# Altium PCB LQFP (32-100 PIN).PcbDoc
Units mm, origin at the board's own origin, x right, y up, seen from the top; angles counter-clockwise.
Board outline 41.4 x 38.6 mm, 2 copper layers (Top Layer, Bottom Layer), stack 1.569 mm thick; 6 components, 100 nets, 264 pads, 0 vias.
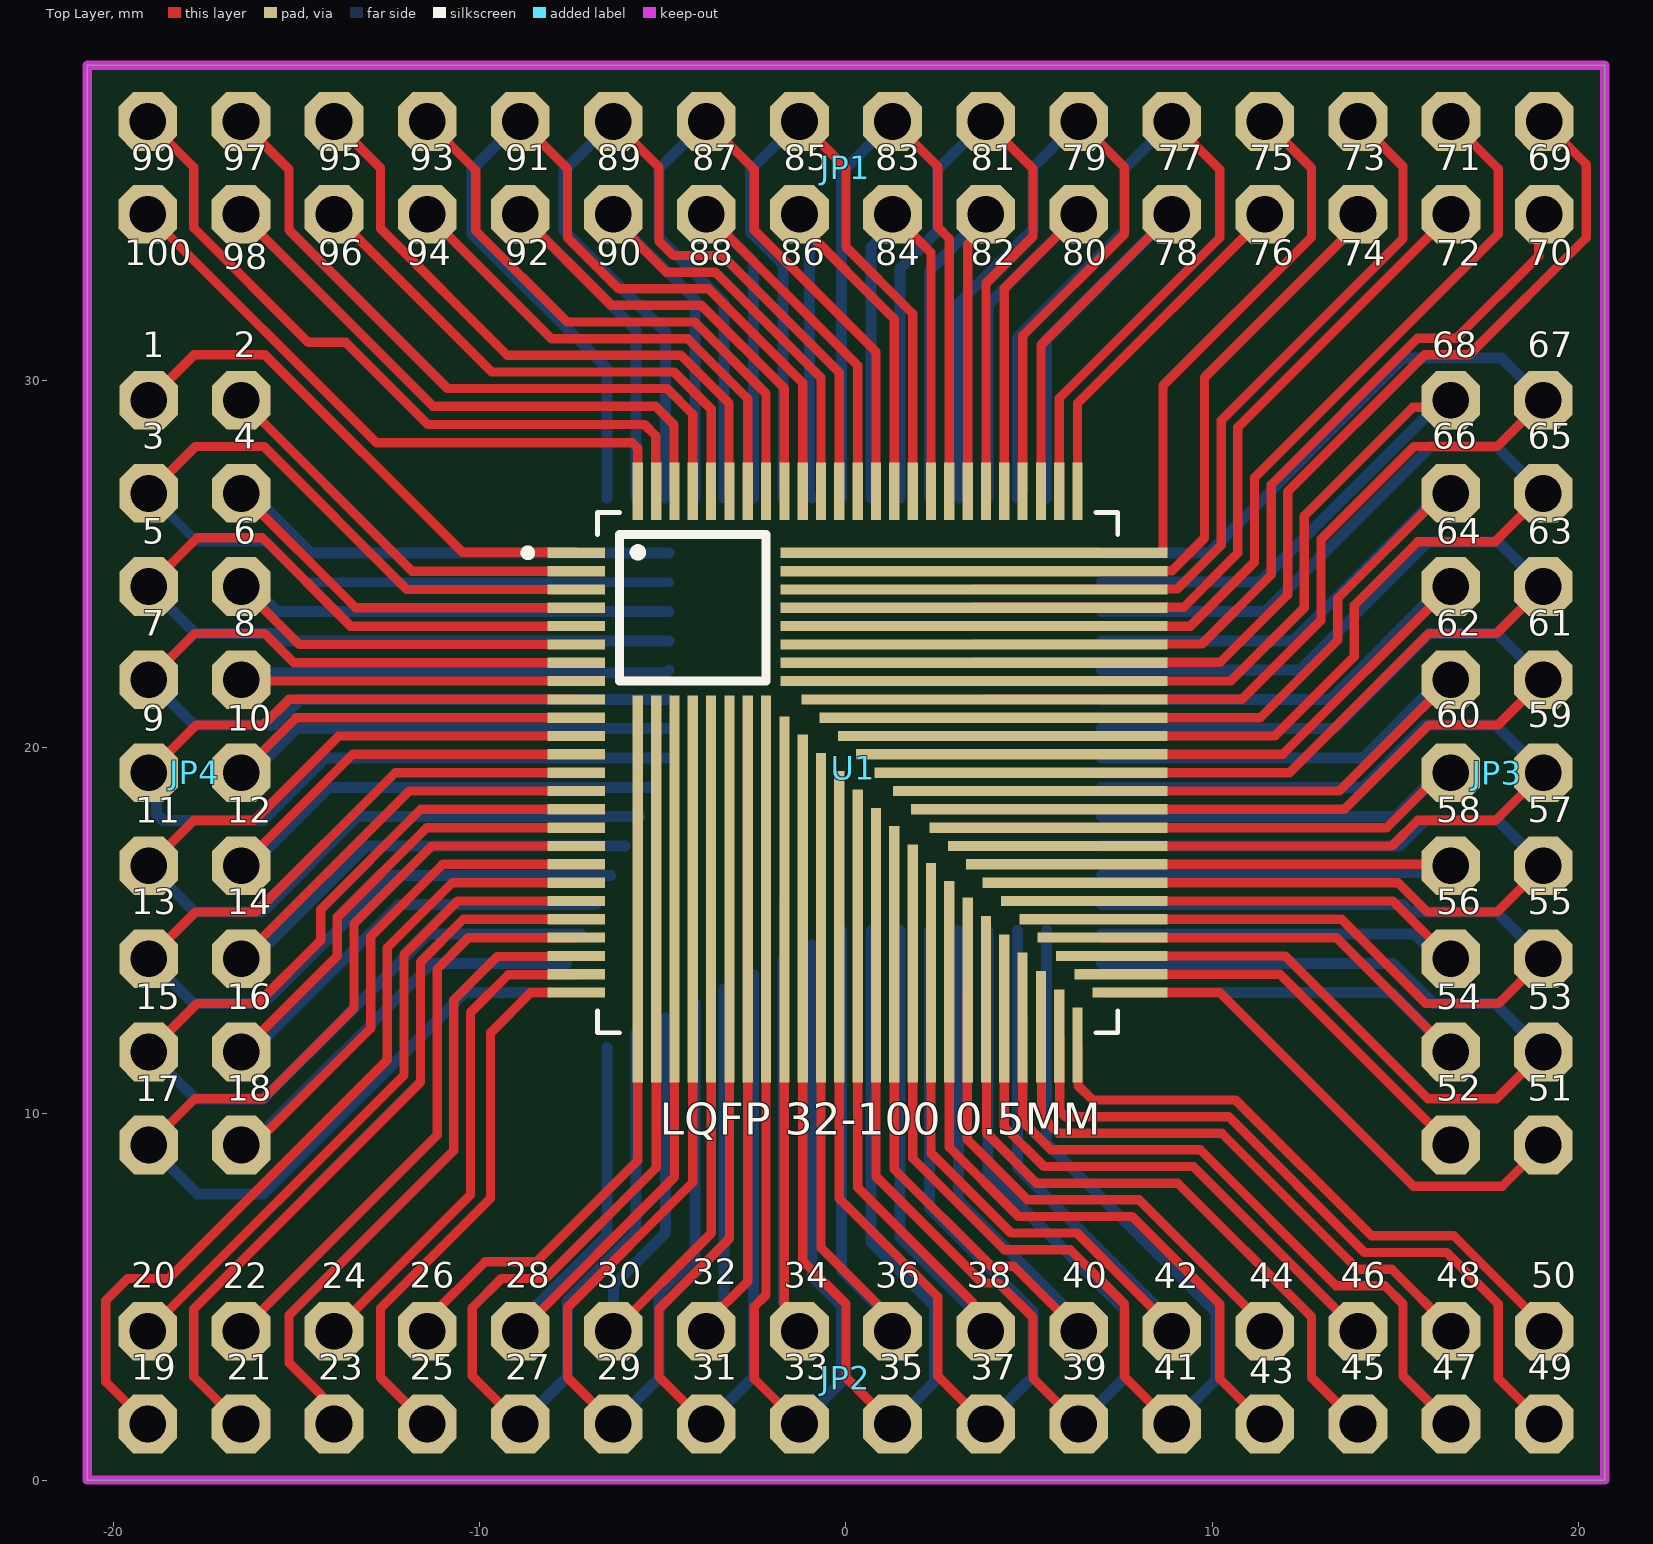
[diagram p0: Top Layer view]
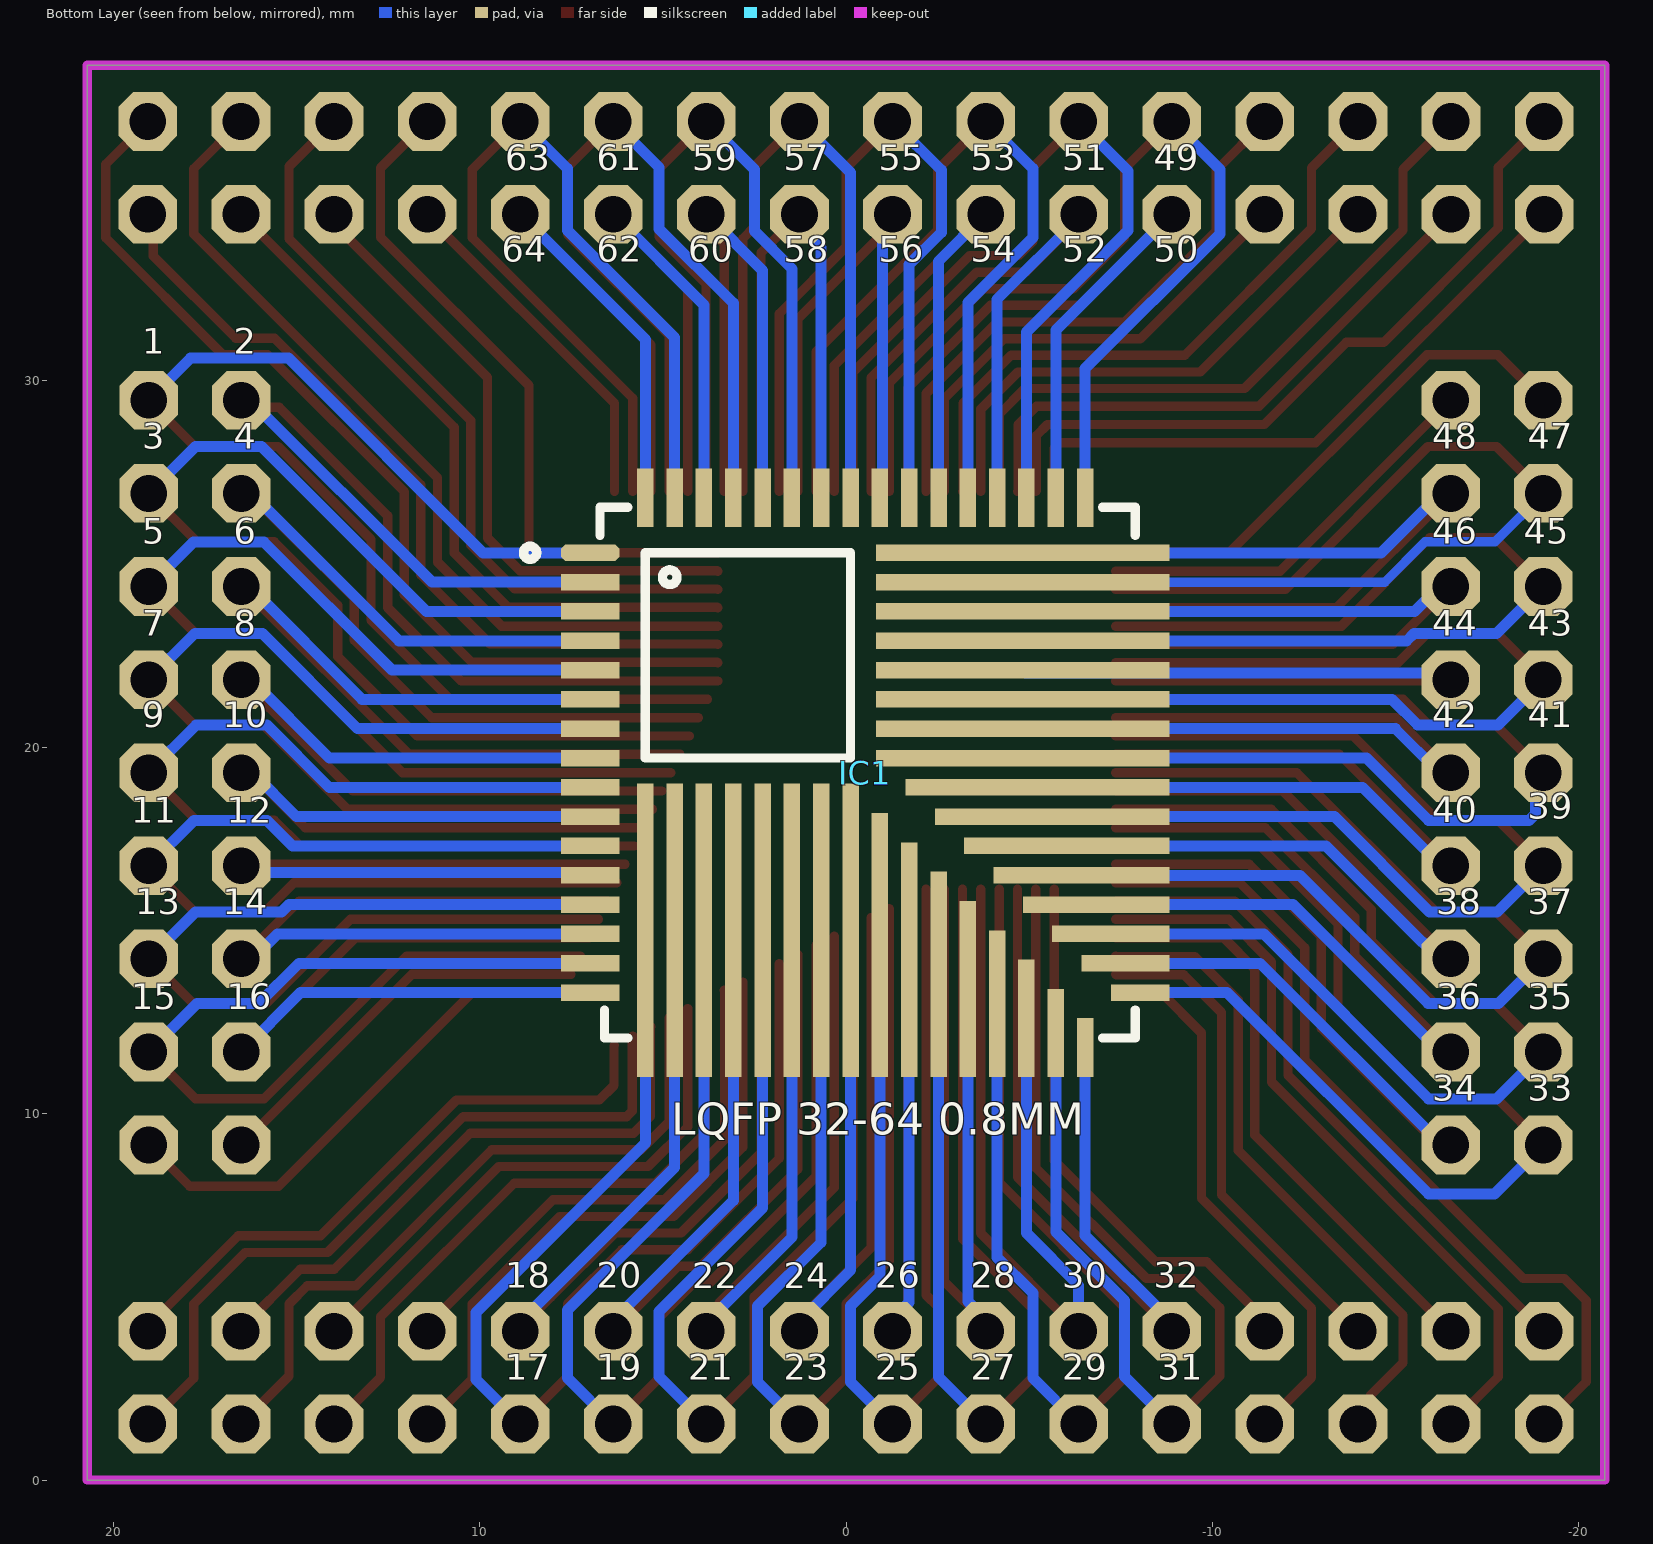
[diagram p1: Bottom Layer view, seen from below]
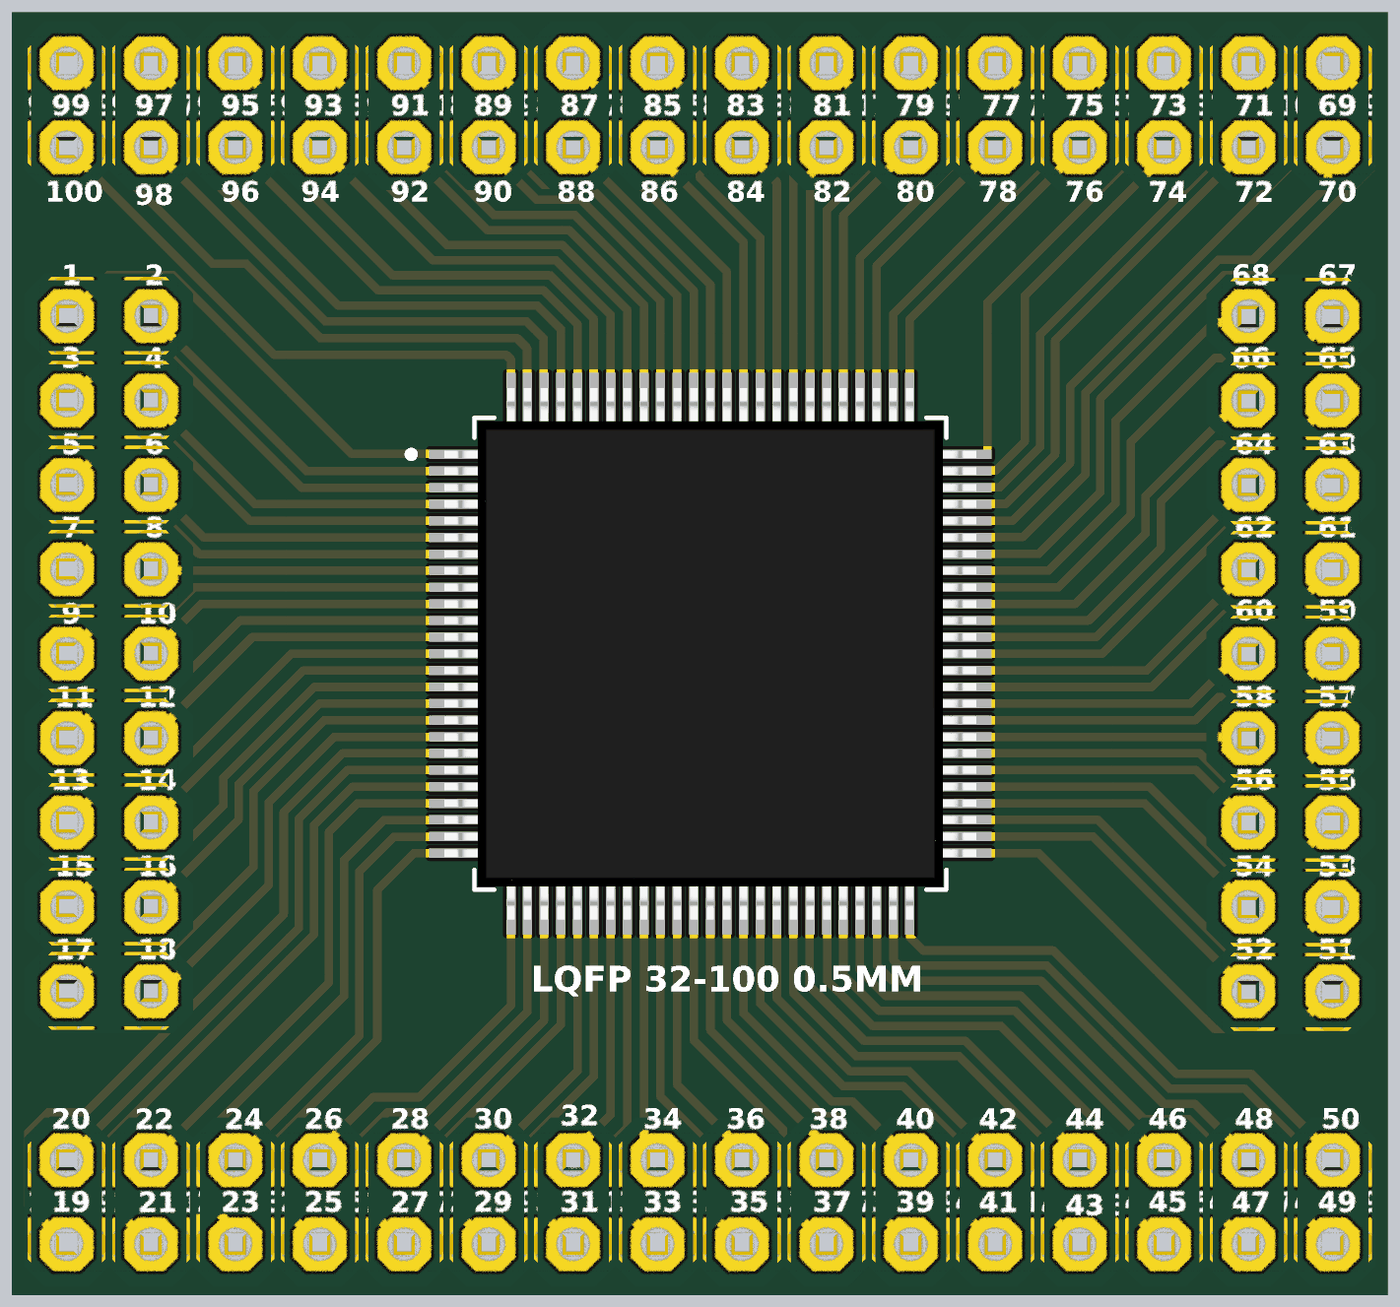
[diagram p2: 3D render of the assembled board from above, using the file's embedded part models]

## Layer stack, top to bottom
Top Solder: solder mask 0.0102, Solder Resist, Dk 3.5
Top Layer: signal copper 0.035
Dielectric 1: core 1.4986, Core-043, Dk 4.3
Bottom Layer: signal copper 0.035
Bottom Solder: solder mask 0.0102, Solder Resist, Dk 3.5

## Board outline
-20.7,0 -20.7,38.6 20.7,38.6 20.7,0

## Design rules (kind name [scope] priority, off if disabled: settings)
Clearance [All] p1: gap=0.254 ignorepadtopadclearanceinfootprint=FALSE except(0: Arc-Hole Track-Hole SMDPad-Hole THPad-Hole Via-Hole Fill-Hole Poly-Hole Region-Hole Text-Hole; 0.1: Arc-Text Track-Text SMDPad-Text THPad-Text Via-Text Fill-Text Poly-Text Region-Text Text-Text; 0.2: Arc-Arc Arc-Track Arc-SMDPad Arc-THPad Arc-Via Track-Track Track-SMDPad Track-THPad Track-Via SMDPad-SMDPad SMDPad-THPad SMDPad-Via THPad-THPad THPad-Via Via-Via)
PlaneClearance [All] p1 off: clearance=0.508
PlaneConnect [All] p1 off: planeconnectstyle=Relief reliefexpansion=0.508 reliefentries=4 reliefconductorwidth=0.254 reliefairgap=0.254
PolygonConnect [All] p1 off: connectstyle=Relief reliefconductorwidth=0.254 reliefentries=4 polygonreliefangle="90 Angle" airgapwidth=0.254
RoomDefinition "LQFP (32-100 PIN) 0.5mm" [InComponentClass('LQFP (32-100 PIN) 0.5mm')] p1: confinementstyle=ConfineIn formatcopy=TRUE lockcomponents=TRUE outline -22.2,-1.694 21.8,-1.694 21.8,39.5 -22.2,39.5
RoutingVias [All] p1: holewidth=0.711 width=1.27 viastyle="Through Hole" minholewidth=0.711 minwidth=1.27 maxholewidth=0.711 maxwidth=1.27
SolderMaskExpansion [All] p1: expansion=0.102 istentingtop=FALSE
Width [All] p1: maxlimit=0.4 minlimit=0.2 preferedwidth=0.254
28 further rules are at their usual default settings.

## Components (designator, comment, footprint, x,y, rotation, side; value= is the part's Value field where it differs from the comment)
IC1 "ATMEGA128 SMD" "TQFP 32-64 0.8MM" -0.525,19.3 r180 bottom
JP1 "HEADER 16X2" "Double Row 32P 2.54mm" 0,37.07 r180 top
JP2 "HEADER 16X2" "Double Row 32P 2.54mm" 0,1.53 r0 top
JP3 "HEADER 9X2" "Double Row 18P 2.54mm" 19.05,19.29 r90 top
JP4 "HEADER 9X2" "Double Row 18P 2.54mm" -19.05,19.31 r270 top
U1 "STM32F407VGT6" "LQFP (32-100 PIN) 0.5mm" 0.319,19.3 r0 top

## Footprints (in the part's own frame and the unit in brackets; to place one, negate y for a bottom-side part, rotate by r counter-clockwise, add the part's x,y. Pads: shape width x height; smd on the part's side, far side on the other; paste and mask are expansions set on the pad)
"Double Row 18P 2.54mm" [mm]
  oct 1.6x1.6 hole 1: 1(-10.15,0.02) 2(-10.15,2.55) 3(-7.61,0.02) 4(-7.61,2.55) 5(-5.07,0.02) 6(-5.07,2.55) 7(-2.53,0.02) 8(-2.53,2.55) 9(0.01,0.02) 10(0.01,2.55) 11(2.55,0.02) 12(2.55,2.55) 13(5.09,0.02) 14(5.09,2.55) 15(7.63,0.02) 16(7.63,2.55) 17(10.17,0.02) 18(10.17,2.55)
  body extent -11.44,-1.27 11.42,3.81, height 8.62
"Double Row 32P 2.54mm" [mm]
  oct 1.6x1.6 hole 1: 1(-19.05,0) 2(-19.05,2.53) 3(-16.51,0) 4(-16.51,2.53) 5(-13.97,0) 6(-13.97,2.53) 7(-11.43,0) 8(-11.43,2.53) 9(-8.89,0) 10(-8.89,2.53) 11(-6.35,0) 12(-6.35,2.53) 13(-3.81,0) 14(-3.81,2.53) 15(-1.27,0) 16(-1.27,2.53) 17(1.27,0) 18(1.27,2.53) 19(3.81,0) 20(3.81,2.53) 21(6.35,0) 22(6.35,2.53) 23(8.89,0) 24(8.89,2.53) 25(11.43,0) 26(11.43,2.53) 27(13.97,0) 28(13.97,2.53) 29(16.51,0) 30(16.51,2.53) 31(19.05,0) 32(19.05,2.53)
  body extent -20.32,-1.27 20.32,3.81, height 8.62
"LQFP (32-100 PIN) 0.5mm" [mm]
  rect 1.56x0.28 smd: 1(-7.68,6) 2(-7.68,5.5) 3(-7.68,5) 4(-7.68,4.5) 5(-7.68,4) 6(-7.68,3.5) 7(-7.68,3) 8(-7.68,2.5) 9(-7.68,2) 10(-7.68,1.5) 11(-7.68,1) 12(-7.68,0.5) 13(-7.68,0) 14(-7.68,-0.5) 15(-7.68,-1) 16(-7.68,-1.5) 17(-7.68,-2) 18(-7.68,-2.5) 19(-7.68,-3) 20(-7.68,-3.5) 21(-7.68,-4) 22(-7.68,-4.5) 23(-7.68,-5) 24(-7.68,-5.5) 25(-7.68,-6)
  rect 0.28x10.56 smd: 26(-6,-3.18) 27(-5.5,-3.18) 28(-5,-3.18) 29(-4.5,-3.18) 30(-4,-3.18) 31(-3.5,-3.18) 32(-3,-3.18) 33(-2.5,-3.18)
  rect 0.28x10 smd: 34(-2,-3.46)
  rect 0.28x9.5 smd: 35(-1.5,-3.71)
  rect 0.28x9 smd: 36(-1,-3.96)
  rect 0.28x8.5 smd: 37(-0.5,-4.21)
  rect 0.28x8 smd: 38(0,-4.46)
  rect 0.28x7.5 smd: 39(0.5,-4.71)
  rect 0.28x7 smd: 40(1,-4.96)
  rect 0.28x6.5 smd: 41(1.5,-5.21)
  rect 0.28x6 smd: 42(2,-5.46)
  rect 0.28x5.5 smd: 43(2.5,-5.71)
  rect 0.28x5.05 smd: 44(3,-5.935)
  rect 0.28x4.55 smd: 45(3.5,-6.185)
  rect 0.28x4.05 smd: 46(4,-6.435)
  rect 0.28x3.55 smd: 47(4.5,-6.685)
  rect 0.28x3.05 smd: 48(5,-6.935)
  rect 0.28x2.55 smd: 49(5.5,-7.185)
  rect 0.28x2.05 smd: 50(6,-7.435)
  rect 2.05x0.28 smd: 51(7.435,-6)
  rect 2.55x0.28 smd: 52(7.185,-5.5)
  rect 3.05x0.28 smd: 53(6.935,-5)
  rect 3.55x0.28 smd: 54(6.685,-4.5)
  rect 4.05x0.28 smd: 55(6.435,-4)
  rect 4.55x0.28 smd: 56(6.185,-3.5)
  rect 5.05x0.28 smd: 57(5.935,-3)
  rect 5.5x0.28 smd: 58(5.71,-2.5)
  rect 6x0.28 smd: 59(5.46,-2)
  rect 6.5x0.28 smd: 60(5.21,-1.5)
  rect 7x0.28 smd: 61(4.96,-1)
  rect 7.5x0.28 smd: 62(4.71,-0.5)
  rect 8x0.28 smd: 63(4.46,0)
  rect 8.5x0.28 smd: 64(4.21,0.5)
  rect 9x0.28 smd: 65(3.96,1)
  rect 9.5x0.28 smd: 66(3.71,1.5)
  rect 10x0.28 smd: 67(3.46,2)
  rect 10.56x0.28 smd: 68(3.18,2.5) 69(3.18,3) 70(3.18,3.5) 71(3.18,4) 72(3.18,4.5) 73(3.18,5) 74(3.18,5.5) 75(3.18,6)
  rect 0.28x1.56 smd: 76(6,7.68) 77(5.5,7.68) 78(5,7.68) 79(4.5,7.68) 80(4,7.68) 81(3.5,7.68) 82(3,7.68) 83(2.5,7.68) 84(2,7.68) 85(1.5,7.68) 86(1,7.68) 87(0.5,7.68) 88(0,7.68) 89(-0.5,7.68) 90(-1,7.68) 91(-1.5,7.68) 92(-2,7.68) 93(-2.5,7.68) 94(-3,7.68) 95(-3.5,7.68) 96(-4,7.68) 97(-4.5,7.68) 98(-5,7.68) 99(-5.5,7.68) 100(-6,7.68)
  silkscreen extent -9.1,-7.1 7.1,7.1, body extent -8,-8 8,8, height 1.48
"TQFP 32-64 0.8MM" [mm]
  oct 1.6x0.45 smd: 1(-7.5,6)
  rect 1.6x0.45 smd: 2(-7.5,5.2) 3(-7.5,4.4) 4(-7.5,3.6) 5(-7.5,2.8) 6(-7.5,2) 7(-7.5,1.2) 8(-7.5,0.4) 9(-7.5,-0.4) 10(-7.5,-1.2) 11(-7.5,-2) 12(-7.5,-2.8) 13(-7.5,-3.6) 14(-7.5,-4.4) 15(-7.5,-5.2) 16(-7.5,-6) 33(7.5,-6)
  rect 0.45x8 smd: 17(-6,-4.3) 18(-5.2,-4.3) 19(-4.4,-4.3) 20(-3.6,-4.3) 21(-2.8,-4.3) 22(-2,-4.3) 23(-1.2,-4.3) 24(-0.4,-4.3)
  rect 0.45x7.2 smd: 25(0.4,-4.7)
  rect 0.45x6.4 smd: 26(1.2,-5.1)
  rect 0.45x5.6 smd: 27(2,-5.5)
  rect 0.45x4.8 smd: 28(2.8,-5.9)
  rect 0.45x4 smd: 29(3.6,-6.3)
  rect 0.45x3.2 smd: 30(4.4,-6.7)
  rect 0.45x2.4 smd: 31(5.2,-7.1)
  rect 0.45x1.6 smd: 32(6,-7.5) 49(6,7.5) 50(5.2,7.5) 51(4.4,7.5) 52(3.6,7.5) 53(2.8,7.5) 54(2,7.5) 55(1.2,7.5) 56(0.4,7.5) 57(-0.4,7.5) 58(-1.2,7.5) 59(-2,7.5) 60(-2.8,7.5) 61(-3.6,7.5) 62(-4.4,7.5) 63(-5.2,7.5) 64(-6,7.5)
  rect 2.4x0.45 smd: 34(7.1,-5.2)
  rect 3.2x0.45 smd: 35(6.7,-4.4)
  rect 4x0.45 smd: 36(6.3,-3.6)
  rect 4.8x0.45 smd: 37(5.9,-2.8)
  rect 5.6x0.45 smd: 38(5.5,-2)
  rect 6.4x0.45 smd: 39(5.1,-1.2)
  rect 7.2x0.45 smd: 40(4.7,-0.4)
  rect 8x0.45 smd: 41(4.3,0.4) 42(4.3,1.2) 43(4.3,2) 44(4.3,2.8) 45(4.3,3.6) 46(4.3,4.4) 47(4.3,5.2) 48(4.3,6)
  silkscreen extent -9.32,-7.24 7.37,7.24, body extent -7.99,-8 8.01,8, height 1.63

## Nets (pads, with @x,y where several pads share a name; then routed paths per layer and width w, separated by ;. In a path a pad name is that pad's centre, name@x,y a point inside that pad or via, vN(x,y) a via of type N, cw(c..) or ccw(c..) an arc to the next point about the centre after c; other vN are vias at no path point)
1: JP4.1 U1.1 | length 14.4
  Top Layer w0.254: JP4.1 -17.79,30.7 -15.852,30.7 -10.465,25.313 -7.374,25.313 U1.1
2: JP4.2 U1.2 | length 11.1
  Top Layer w0.254: JP4.2 -11.84,24.8 U1.2
3: IC1.47 JP4.3 U1.3 | length 29
  Top Layer w0.254: JP4.3 -17.75,28.2 -15.882,28.2 -11.982,24.3 U1.3
  Bottom Layer w0.254: JP4.3 -17.71,25.6 -15.8,25.6 -14.7,24.5 IC1.47
4: IC1.48 JP4.4 U1.4 | length 22.8
  Top Layer w0.254: JP4.4 -13.38,23.8 U1.4
  Bottom Layer w0.3: JP4.4 -16.22,26.92 -14.6,25.3 IC1.48
5: IC1.45 JP4.5 U1.5 | length 28
  Top Layer w0.254: JP4.5 -17.7,25.71 -15.932,25.71 -13.522,23.3 U1.5
  Bottom Layer w0.3: JP4.5 -17.75,23.1 -15.5,23.1 -15.3,22.9 IC1.45
6: IC1.46 JP4.6 U1.6 | length 21.8
  Top Layer w0.254: JP4.6 -14.92,22.8 U1.6
  Bottom Layer w0.3: JP4.6 -16.188,24.38 -15.508,23.7 IC1.46
7: IC1.43 JP4.7 U1.7 | length 27.5
  Top Layer w0.254: JP4.7 -17.77,23.1 -15.862,23.1 -15.062,22.3 U1.7
  Bottom Layer w0.3: JP4.7 -17.79,20.6 -15.6,20.6 -14.9,21.3 IC1.43
8: IC1.44 JP4.8 U1.8 | length 20.9
  Top Layer w0.254: JP4.8 -16.46,21.8 U1.8
  Bottom Layer w0.3: JP4.8 -16.315,22.025 -4.9,22.025 IC1.44
9: IC1.41 JP4.9 U1.9 | length 28.5
  Top Layer w0.254: JP4.9 -17.73,20.6 -15.9,20.6 -15.2,21.3 U1.9
  Bottom Layer w0.3: JP4.9 -18.818,19.088 -18.818,18.176 -18.642,18 -15.9,18 -14.2,19.7 IC1.41
10: IC1.42 JP4.10 U1.10 | length 21.9
  Top Layer w0.254: JP4.10 -15,20.8 U1.10
  Bottom Layer w0.3: JP4.10 -16.188,19.3 -14.988,20.5 IC1.42
11: IC1.39 JP4.11 U1.11 | length 28.1
  Top Layer w0.254: JP4.11 -17.79,18 -16.138,18 -13.838,20.3 U1.11
  Bottom Layer w0.3: JP4.11 -17.77,15.5 -15.927,15.5 -13.327,18.1 IC1.39
12: IC1.40 JP4.12 U1.12 | length 22.6
  Top Layer w0.254: JP4.12 -13.46,19.8 U1.12
  Bottom Layer w0.3: JP4.12 -16.24,16.76 -14.1,18.9 IC1.40
13: IC1.37 JP4.13 U1.13 | length 28.3
  Top Layer w0.254: JP4.13 -17.75,15.5 -16.098,15.5 -12.298,19.3 U1.13
  Bottom Layer w0.3: JP4.13 -17.81,13 -15.887,13 -12.387,16.5 IC1.37
14: IC1.38 JP4.14 U1.14 | length 22.8
  Top Layer w0.254: JP4.14 -11.92,18.8 U1.14
  Bottom Layer w0.3: JP4.14 -16.188,14.22 -15.73,14.678 -15.722,14.678 -13.1,17.3 IC1.38
15: IC1.35 JP4.15 U1.15 | length 29.1
  Top Layer w0.254: JP4.15 -17.71,13 -16.058,13 -14.332,14.726 -14.332,15.568 -11.6,18.3 U1.15
  Bottom Layer w0.3: JP4.15 -17.75,10.4 -15.9,10.4 -11.4,14.9 IC1.35
16: IC1.36 JP4.16 U1.16 | length 23.6
  Top Layer w0.254: JP4.16 -13.878,14.302 -13.878,15.364 -11.442,17.8 U1.16
  Bottom Layer w0.3: JP4.16 -16.22,11.68 -12.2,15.7 IC1.36
17: IC1.33 JP4.17 U1.17 | length 30.2
  Top Layer w0.254: JP4.17 -17.77,10.4 -15.9,10.4 -13.424,12.876 -13.424,15.176 -11.3,17.3 U1.17
  Bottom Layer w0.3: JP4.17 -17.69,7.8 -15.9,7.8 -10.4,13.3 IC1.33
18: IC1.34 JP4.18 U1.18 | length 24.7
  Top Layer w0.254: JP4.18 -16.174,9.14 -15.729,9.585 -15.715,9.585 -12.97,12.33 -12.97,14.83 -11,16.8 U1.18
  Bottom Layer w0.3: JP4.18 -16.26,9.14 -11.3,14.1 IC1.34
19: JP2.1 U1.19 | length 23.2
  Top Layer w0.254: JP2.1 -20.2,2.68 -20.2,4.9 -19.6,5.5 -18.478,5.5 -12.516,11.462 -12.516,14.526 -10.742,16.3 U1.19
20: JP2.2 U1.20 | length 18.5
  Top Layer w0.254: JP2.2 -12.062,11.048 -12.062,14.338 -10.6,15.8 U1.20
21: JP2.3 U1.21 | length 20.4
  Top Layer w0.254: JP2.3 -17.8,2.82 -17.8,4.668 -11.608,10.86 -11.608,14.134 -10.442,15.3 U1.21
22: JP2.4 U1.22 | length 16.3
  Top Layer w0.254: JP2.4 -11.154,9.416 -11.154,13.946 -10.3,14.8 U1.22
23: JP2.5 U1.23 | length 17.8
  Top Layer w0.254: JP2.5 -14.317,1.877 -14.317,2.317 -15.2,3.2 -15.2,4.492 -10.7,8.992 -10.7,13.1 -9.513,14.287 -7.374,14.287 U1.23
24: JP2.6 U1.24 | length 13.6
  Top Layer w0.254: JP2.6 -10.246,7.784 -10.246,12.754 -9.213,13.787 -7.374,13.787 U1.24
25: JP2.7 U1.25 | length 15.2
  Top Layer w0.254: JP2.7 -12.7,2.8 -12.7,4.688 -9.7,7.688 -9.7,12.2 -8.6,13.3 U1.25
26: JP2.8 U1.26 | length 15.3
  Top Layer w0.254: JP2.8 -11.43,4.37 -9.846,5.954 -8.446,5.954 -5.681,8.719 U1.26
27: IC1.31 JP2.9 U1.27 | length 29.9
  Top Layer w0.254: JP2.9 -10.2,2.84 -10.2,4.7 -9.4,5.5 -8.2,5.5 -5.181,8.519 U1.27
  Bottom Layer w0.3: JP2.9 -7.6,2.82 -7.6,4.893 -5.724,6.768 IC1.31
28: IC1.32 JP2.10 U1.28 | length 22.5
  Top Layer w0.254: JP2.10 -4.681,8.269 U1.28
  Bottom Layer w0.3: JP2.10 -8.89,4.31 -6.524,6.676 IC1.32
29: IC1.29 JP2.11 U1.29 | length 28.9
  Top Layer w0.254: JP2.11 -6.35,1.55 -7.6,2.8 -7.6,4.708 -4.181,8.127 U1.29
  Bottom Layer w0.3: JP2.11 -5.1,2.78 -5.1,5.1 -4.124,6.076 IC1.29
30: IC1.30 JP2.12 U1.30 | length 22.3
  Top Layer w0.254: JP2.12 -3.681,6.729 U1.30
  Bottom Layer w0.3: JP2.12 -6.35,5.31 -4.924,6.736 IC1.30
31: IC1.27 JP2.13 U1.31 | length 28.7
  Top Layer w0.254: JP2.13 -5.1,2.82 -5.1,4.668 -3.181,6.587 U1.31
  Bottom Layer w0.3: JP2.13 -2.524,2.816 IC1.27
32: IC1.28 JP2.14 U1.32 | length 22.1
  Top Layer w0.254: JP2.14 -3.81,4.29 -2.681,5.419 U1.32
  Bottom Layer w0.3: JP2.14 -3.81,4.386 -3.324,4.871 IC1.28
33: IC1.25 JP2.15 U1.33 | length 29.1
  Top Layer w0.254: U1.33 -2.181,5.047 -2.5,4.728 -2.5,2.76 JP2.15
  Bottom Layer w0.3: JP2.15 -0.12,2.68 -0.12,4.743 -0.924,5.547 IC1.25
34: IC1.26 JP2.16 U1.34 | length 22.3
  Top Layer w0.254: U1.34 -1.681,4.796 -1.27,4.386 JP2.16
  Bottom Layer w0.3: IC1.26 -1.724,4.84 -1.27,4.386 JP2.16
35: IC1.23 JP2.17 U1.35 | length 29.7
  Top Layer w0.254: U1.35 -1.181,5.981 0,4.8 0,2.8 JP2.17
  Bottom Layer w0.3: IC1.23 0.675,6.487 2.42,4.743 2.42,2.68 JP2.17
36: IC1.24 JP2.18 U1.36 | length 23.6
  Top Layer w0.254: U1.36 -0.681,6.336 1.27,4.386 JP2.18
  Bottom Layer w0.3: IC1.24 -0.125,5.725 1.27,4.33 JP2.18
37: IC1.21 JP2.19 U1.37 | length 30.4
  Top Layer w0.254: U1.37 -0.181,7.681 2.5,5 2.5,2.84 JP2.19
  Bottom Layer w0.3: IC1.21 2.275,7.427 5.1,4.603 5.1,2.82 JP2.19
38: IC1.22 JP2.20 U1.38 | length 24.1
  Top Layer w0.254: U1.38 0.319,7.981 3.463,4.837 3.463,4.407 JP2.20
  Bottom Layer w0.3: IC1.22 1.475,6.625 3.81,4.29 JP2.20
39: IC1.19 JP2.21 U1.39 | length 31.1
  Top Layer w0.254: U1.39 0.819,8.281 3.724,5.376 4.156,5.376 5.1,4.432 5.1,2.78 JP2.21
  Bottom Layer w0.3: IC1.19 3.875,8.367 7.6,4.643 7.6,2.78 JP2.21
40: IC1.20 JP2.22 U1.40 | length 25
  Top Layer w0.254: U1.40 1.319,8.481 3.97,5.83 4.58,5.83 JP2.22
  Bottom Layer w0.3: IC1.20 3.075,7.625 6.35,4.35 JP2.22
41: IC1.17 JP2.23 U1.41 | length 32.4
  Top Layer w0.254: U1.41 1.819,8.781 4.316,6.284 6.116,6.284 7.6,4.8 7.6,2.82 JP2.23
  Bottom Layer w0.3: IC1.17 5.475,9.197 10.1,4.573 10.1,2.74 JP2.23
42: IC1.18 JP2.24 U1.42 | length 26.2
  Top Layer w0.254: U1.42 2.319,8.923 4.504,6.738 6.304,6.738 8.054,4.988 8.89,4.152 JP2.24
  Bottom Layer w0.3: IC1.18 4.675,8.525 8.89,4.31 JP2.24
43: JP2.25 U1.43 | length 17.4
  Top Layer w0.254: U1.43 2.819,9.081 4.708,7.192 7.808,7.192 10.2,4.8 10.2,2.76 JP2.25
44: JP2.26 U1.44 | length 14.5
  Top Layer w0.254: U1.44 3.306,13.352 3.306,9.294 4.954,7.646 7.996,7.646 10.654,4.988 11.43,4.212 JP2.26
45: JP2.27 U1.45 | length 18
  Top Layer w0.254: U1.45 3.832,13.102 3.832,9.468 5.2,8.1 9.052,8.1 12.7,4.452 12.7,2.8 JP2.27
46: JP2.28 U1.46 | length 15.2
  Top Layer w0.254: U1.46 4.319,9.639 5.404,8.554 9.476,8.554 JP2.28
47: JP2.29 U1.47 | length 19.1
  Top Layer w0.254: U1.47 4.819,9.781 5.592,9.008 9.664,9.008 13.372,5.3 14.7,5.3 15.2,4.8 15.2,2.84 JP2.29
48: JP2.30 U1.48 | length 16.1
  Top Layer w0.254: U1.48 5.332,12.352 5.332,9.926 5.796,9.462 10.254,9.462 13.962,5.754 14.888,5.754 16.51,4.132 JP2.30
49: JP2.31 U1.49 | length 20
  Top Layer w0.254: U1.49 5.832,12.102 5.832,10.068 5.984,9.916 10.442,9.916 14.15,6.208 16.392,6.208 17.8,4.8 17.8,2.78 JP2.31
50: JP2.32 U1.50 | length 16.7
  Top Layer w0.254: U1.50 6.332,11.852 6.332,10.768 6.73,10.37 10.63,10.37 14.338,6.662 16.58,6.662 19.05,4.192 JP2.32
51: JP3.1 U1.51 | length 13.9
  Top Layer w0.254: U1.51 10.2,13.3 15.487,8.013 17.903,8.013 JP3.1
52: JP3.2 U1.52 | length 10.9
  Top Layer w0.254: U1.52 11.84,13.8 JP3.2
53: IC1.15 JP3.3 U1.53 | length 27
  Top Layer w0.254: U1.53 11.982,14.3 15.882,10.4 17.75,10.4 JP3.3
  Bottom Layer w0.3: IC1.15 14.925,14.1 16.025,13 17.71,13 JP3.3
54: IC1.16 JP3.4 U1.54 | length 21
  Top Layer w0.254: U1.54 13.38,14.8 JP3.4
  Bottom Layer w0.3: IC1.16 14.88,13.3 JP3.4
55: IC1.13 JP3.5 U1.55 | length 26.4
  Top Layer w0.254: U1.55 13.522,15.3 15.822,13 17.81,13 JP3.5
  Bottom Layer w0.3: IC1.13 15.2,15.7 15.4,15.5 17.75,15.5 JP3.5
56: IC1.14 JP3.6 U1.56 | length 20.5
  Top Layer w0.254: U1.56 14.92,15.8 JP3.6
  Bottom Layer w0.3: IC1.14 15.508,14.9 16.188,14.22 JP3.6
57: IC1.11 JP3.7 U1.57 | length 26.5
  Top Layer w0.254: U1.57 15.062,16.3 15.862,15.5 17.77,15.5 JP3.7
  Bottom Layer w0.3: IC1.11 15.1,17.3 15.8,18 17.79,18 JP3.7
58: IC1.12 JP3.8 U1.58 | length 20.1
  Top Layer w0.254: U1.58 16.46,16.8 JP3.8
  Bottom Layer w0.3: IC1.12 7.05,16.575 16.315,16.575 JP3.8
59: IC1.9 JP3.9 U1.59 | length 27.4
  Top Layer w0.254: U1.59 14.9,17.3 15.6,18 17.73,18 JP3.9
  Bottom Layer w0.3: IC1.9 14.1,18.9 15.8,20.6 17.73,20.6 JP3.9
60: IC1.10 JP3.10 U1.60 | length 21.6
  Top Layer w0.254: U1.60 14.758,17.8 16.258,19.3 JP3.10
  Bottom Layer w0.3: IC1.10 15,18.1 16.2,19.3 JP3.10
61: IC1.7 JP3.11 U1.61 | length 28.9
  Top Layer w0.254: U1.61 13.6,18.3 15.9,20.6 17.79,20.6 JP3.11
  Bottom Layer w0.3: IC1.7 13.327,20.5 15.927,23.1 17.77,23.1 JP3.11
62: IC1.8 JP3.12 U1.62 | length 23.1
  Top Layer w0.254: U1.62 13.458,18.8 15.712,21.054 15.714,21.054 JP3.12
  Bottom Layer w0.3: IC1.8 14.1,19.7 16.24,21.84 JP3.12
63: IC1.5 JP3.13 U1.63 | length 30.4
  Top Layer w0.254: U1.63 12.1,19.3 15.9,23.1 17.75,23.1 JP3.13
  Bottom Layer w0.3: IC1.5 12.387,22.1 15.887,25.6 17.81,25.6 JP3.13
64: IC1.6 JP3.14 U1.64 | length 24.7
  Top Layer w0.254: U1.64 11.92,19.8 JP3.14
  Bottom Layer w0.3: IC1.6 13.2,21.3 16.28,24.38 JP3.14
65: IC1.3 JP3.15 U1.65 | length 32.8
  Top Layer w0.254: U1.65 11.7,20.3 13.87,22.47 13.87,23.87 15.6,25.6 17.71,25.6 JP3.15
  Bottom Layer w0.3: IC1.3 11.447,23.7 15.947,28.2 17.75,28.2 JP3.15
66: IC1.4 JP3.16 U1.66 | length 26.9
  Top Layer w0.254: U1.66 11.3,20.8 13.416,22.916 13.416,24.058 16.278,26.92 JP3.16
  Bottom Layer w0.3: IC1.4 12.2,22.9 16.22,26.92 JP3.16
67: IC1.1 JP3.17 U1.67 | length 34.6
  Top Layer w0.254: U1.67 10.8,21.3 12.962,23.462 12.962,25.662 15.5,28.2 17.77,28.2 JP3.17
  Bottom Layer w0.3: IC1.1 9.9,25.3 15.21,30.61 17.88,30.61 JP3.17
68: IC1.2 JP3.18 U1.68 | length 29.2
  Top Layer w0.254: U1.68 10.5,21.8 12.508,23.808 12.508,26.308 15.468,29.268 16.308,29.268 JP3.18
  Bottom Layer w0.3: IC1.2 11.3,24.5 16.26,29.46 JP3.18
69: JP1.1 U1.69 | length 26.8
  Top Layer w0.254: U1.69 3.512,22.313 10.213,22.313 12.054,24.154 12.054,26.97 15.784,30.7 17,30.7 20.2,33.9 20.2,35.9 JP1.1@19.04,37.06
70: JP1.2 U1.70 | length 22.4
  Top Layer w0.254: U1.70 3.512,22.813 9.713,22.813 11.6,24.7 11.6,27.158 15.596,31.154 16.654,31.154 18.9,33.4 18.9,34.39 JP1.2
71: JP1.3 U1.71 | length 23.7
  Top Layer w0.254: U1.71 9.4,23.3 11.146,25.046 11.146,27.346 17.8,34 17.8,35.78 JP1.3
72: JP1.4 U1.72 | length 19.5
  Top Layer w0.254: U1.72 3.512,23.813 9.213,23.813 10.692,25.292 10.692,28.722 JP1.4
73: JP1.5 U1.73 | length 21.4
  Top Layer w0.254: U1.73 3.512,24.313 9.037,24.313 10.238,25.514 10.238,28.91 15.2,33.872 15.2,35.84 JP1.5
74: JP1.6 U1.74 | length 17.2
  Top Layer w0.254: U1.74 3.512,24.813 8.895,24.813 9.784,25.702 9.784,30.084 13.97,34.27 JP1.6
75: JP1.7 U1.75 | length 19.1
  Top Layer w0.254: U1.75 8.639,25.3 8.652,25.313 8.652,29.864 12.7,33.912 12.7,35.8 JP1.7
76: JP1.8 U1.76 | length 9.7
  Top Layer w0.254: U1.76 6.319,29.377 11.43,34.488 JP1.8
77: IC1.63 JP1.9 U1.77 | length 24.5
  Top Layer w0.254: U1.77 5.819,29.519 10.2,33.9 10.2,35.76 JP1.9
  Bottom Layer w0.3: IC1.63 4.675,31.171 7.6,34.095 7.6,35.78 JP1.9
78: IC1.64 JP1.10 U1.78 | length 18.2
  Top Layer w0.254: U1.78 5.319,30.969 JP1.10
  Bottom Layer w0.3: IC1.64 5.475,31.126 JP1.10
79: IC1.61 JP1.11 U1.79 | length 23.4
  Top Layer w0.254: U1.79 4.819,31.219 7.6,34 7.6,35.82 JP1.11
  Bottom Layer w0.3: IC1.61 3.076,32.111 5.1,34.135 5.1,35.82 JP1.11
80: IC1.62 JP1.12 U1.80 | length 17.2
  Top Layer w0.254: U1.80 4.319,32.509 JP1.12
  Bottom Layer w0.3: IC1.62 3.876,32.066 JP1.12
81: IC1.59 JP1.13 U1.81 | length 22.4
  Top Layer w0.254: JP1.13 5.1,35.78 5.1,33.932 3.819,32.651 U1.81
  Bottom Layer w0.3: IC1.59 1.476,33.051 2.5,34.075 2.5,35.76 JP1.13
82: IC1.60 JP1.14 U1.82 | length 16.1
  Top Layer w0.254: U1.82 3.319,33.724 3.81,34.214 JP1.14
  Bottom Layer w0.3: IC1.60 2.276,33.006 JP1.14
83: IC1.57 JP1.15 U1.83 | length 21.6
  Top Layer w0.254: JP1.15 2.5,35.84 2.5,34.188 2.819,33.868 U1.83
  Bottom Layer w0.3: IC1.57 -0.124,33.991 -0.12,33.995 -0.12,35.68 JP1.15
84: IC1.58 JP1.16 U1.84 | length 16
  Top Layer w0.254: JP1.16 2.319,33.491 U1.84
  Bottom Layer w0.3: IC1.58 0.676,33.633 1.27,34.228 JP1.16
85: IC1.55 JP1.17 U1.85 | length 22.6
  Top Layer w0.254: JP1.17 0,35.8 0,33.642 1.819,31.823 U1.85
  Bottom Layer w0.3: IC1.55 -1.724,33.162 -2.6,34.037 -2.6,35.74 JP1.17
86: IC1.56 JP1.18 U1.86 | length 16.5
  Top Layer w0.254: JP1.18 -1.27,34.27 1.319,31.681 U1.86
  Bottom Layer w0.3: JP1.18 -0.999,34.269 -0.999,26.875 IC1.56
87: IC1.53 JP1.19 U1.87 | length 23.5
  Top Layer w0.254: JP1.19 -2.5,35.76 -2.5,34.108 0.819,30.788 U1.87
  Bottom Layer w0.3: JP1.19 -5.1,35.78 -5.1,33.9 -3.324,32.124 IC1.53
88: IC1.54 JP1.20 U1.88 | length 17.5
  Top Layer w0.254: JP1.20 0.319,30.411 U1.88
  Bottom Layer w0.3: JP1.20 -2.524,33.254 IC1.54
89: IC1.51 JP1.21 U1.89 | length 25.4
  Top Layer w0.254: JP1.21 -5.1,35.82 -5.1,33.8 -4.713,33.413 -3.377,33.413 -0.181,30.217 U1.89
  Bottom Layer w0.3: JP1.21 -7.7,35.72 -7.7,34.1 -4.924,31.324 IC1.51
90: IC1.52 JP1.22 U1.90 | length 19.4
  Top Layer w0.254: JP1.22 -6.35,34.408 -4.901,32.959 -3.565,32.959 -0.681,30.075 U1.90
  Bottom Layer w0.3: JP1.22 -6.35,34.443 -4.124,32.217 IC1.52
91: IC1.49 JP1.23 U1.91 | length 27.1
  Top Layer w0.254: JP1.23 -7.6,35.78 -7.6,33.9 -6.205,32.505 -3.753,32.505 -1.181,29.933 U1.91
  Bottom Layer w0.3: JP1.23 -10.2,35.76 -10.2,34 -6.524,30.324 IC1.49
92: IC1.50 JP1.24 U1.92 | length 21
  Top Layer w0.254: JP1.24 -6.401,32.051 -3.941,32.051 -1.681,29.791 U1.92
  Bottom Layer w0.3: JP1.24 -5.724,31.374 IC1.50
93: JP1.25 U1.93 | length 16
  Top Layer w0.254: JP1.25 -10.1,35.74 -10.1,34.088 -7.609,31.597 -4.129,31.597 -2.181,29.649 U1.93
94: JP1.26 U1.94 | length 13.4
  Top Layer w0.254: JP1.26 -8.033,31.143 -4.317,31.143 -2.681,29.507 U1.94
95: JP1.27 U1.95 | length 17.3
  Top Layer w0.254: JP1.27 -12.7,35.8 -12.7,34.148 -9.241,30.689 -4.505,30.689 -3.194,29.378 -3.194,26.993 U1.95
96: JP1.28 U1.96 | length 14.7
  Top Layer w0.254: JP1.28 -9.665,30.235 -4.693,30.235 -3.681,29.223 U1.96
97: JP1.29 U1.97 | length 18.7
  Top Layer w0.254: JP1.29 -15.2,35.76 -15.2,34.108 -10.873,29.781 -4.881,29.781 -4.181,29.081 U1.97
98: JP1.30 U1.98 | length 16
  Top Layer w0.254: JP1.30 -11.27,29.3 -5.2,29.3 -4.694,28.794 -4.694,26.993 U1.98
99: JP1.31 U1.99 | length 19.9
  Top Layer w0.254: JP1.31 -17.8,35.82 -17.8,34.168 -14.673,31.041 -13.653,31.041 -11.412,28.8 -5.5,28.8 -5.194,28.494 -5.194,26.993 U1.99
100: JP1.32 U1.100 | length 17.2
  Top Layer w0.254: JP1.32 -12.81,28.3 -5.83,28.3 -5.681,28.151 U1.100

## Keep-outs
Keep-Out Layer:
  the board outline again, w0.254

## Silkscreen, mask and mechanical layers (free items; w line width, h text height)
Top Overlay:
  text "99" at -19.5,35.511 h1.2
  text "97" at -17,35.511 h1.2
  text "95" at -14.4,35.511 h1.2
  text "93" at -11.9,35.511 h1.2
  text "91" at -9.3,35.511 h1.2
  text "89" at -6.8,35.511 h1.2
  text "87" at -4.2,35.511 h1.2
  text "85" at -1.7,35.511 h1.2
  text "83" at 0.8,35.511 h1.2
  text "81" at 3.4,35.511 h1.2
  text "79" at 5.9,35.511 h1.2
  text "75" at 11,35.511 h1.2
  text "73" at 13.5,35.511 h1.2
  text "69" at 18.6,35.511 h1.2
  text "77" at 8.5,35.502 h1.2
  text "71" at 16.1,35.502 h1.2
  text "100" at -19.7,32.911 h1.2
  text "96" at -14.4,32.911 h1.2
  text "94" at -12,32.911 h1.2
  text "92" at -9.3,32.911 h1.2
  text "90" at -6.8,32.911 h1.2
  text "88" at -4.3,32.911 h1.2
  text "86" at -1.8,32.911 h1.2
  text "84" at 0.8,32.911 h1.2
  text "82" at 3.4,32.911 h1.2
  text "80" at 5.9,32.911 h1.2
  text "78" at 8.4,32.911 h1.2
  text "76" at 11,32.911 h1.2
  text "74" at 13.5,32.902 h1.2
  text "72" at 16.1,32.902 h1.2
  text "70" at 18.6,32.911 h1.2
  text "98" at -17,32.811 h1.2
  text "1" at -19.2,30.4 h1.2
  text "2" at -16.7,30.4 h1.2
  text "68" at 16,30.411 h1.2
  text "67" at 18.6,30.411 h1.2
  text "3" at -19.2,27.911 h1.2
  text "66" at 16,27.911 h1.2
  text "65" at 18.6,27.911 h1.2
  text "4" at -16.7,27.902 h1.2
  text "5" at -19.2,25.311 h1.2
  text "6" at -16.7,25.311 h1.2
  text "64" at 16.1,25.311 h1.2
  text "63" at 18.6,25.311 h1.2
  text "8" at -16.7,22.811 h1.2
  text "62" at 16.1,22.811 h1.2
  text "61" at 18.6,22.811 h1.2
  text "7" at -19.2,22.802 h1.2
  text "60" at 16.1,20.311 h1.2
  text "59" at 18.6,20.311 h1.2
  text "9" at -19.2,20.211 h1.2
  text "10" at -16.9,20.211 h1.2
  text "11" at -19.4,17.7 h1.2
  text "12" at -16.9,17.7 h1.2
  text "58" at 16.1,17.711 h1.2
  text "57" at 18.6,17.711 h1.2
  text "13" at -19.5,15.211 h1.2
  text "56" at 16.1,15.211 h1.2
  text "55" at 18.6,15.211 h1.2
  text "14" at -16.9,15.202 h1.2
  text "15" at -19.4,12.611 h1.2
  text "16" at -16.9,12.611 h1.2
  text "54" at 16.1,12.611 h1.2
  text "53" at 18.6,12.611 h1.2
  text "18" at -16.9,10.111 h1.2
  text "52" at 16.1,10.111 h1.2
  text "51" at 18.6,10.111 h1.2
  text "17" at -19.4,10.102 h1.2
  text "LQFP 32-100 0.5MM" at -5.084,9.139 h1.5
  text "32" at -4.2,5.111 h1.2
  text "20" at -19.5,5.011 h1.2
  text "22" at -17,5 h1.2
  text "24" at -14.3,5.002 h1.2
  text "26" at -11.9,5.011 h1.2
  text "28" at -9.3,5.011 h1.2
  text "30" at -6.8,5.011 h1.2
  text "34" at -1.7,5.011 h1.2
  text "36" at 0.8,5.011 h1.2
  text "38" at 3.3,5.011 h1.2
  text "40" at 5.9,5.011 h1.2
  text "42" at 8.4,5.002 h1.2
  text "44" at 11,5.002 h1.2
  text "46" at 13.5,5.011 h1.2
  text "48" at 16.1,5.011 h1.2
  text "50" at 18.7,5.011 h1.2
  text "19" at -19.5,2.511 h1.2
  text "23" at -14.4,2.511 h1.2
  text "25" at -11.9,2.511 h1.2
  text "29" at -6.8,2.511 h1.2
  text "31" at -4.2,2.511 h1.2
  text "33" at -1.7,2.511 h1.2
  text "35" at 0.9,2.511 h1.2
  text "37" at 3.4,2.511 h1.2
  text "39" at 5.9,2.511 h1.2
  text "45" at 13.5,2.511 h1.2
  text "49" at 18.6,2.511 h1.2
  text "21" at -16.9,2.5 h1.2
  text "27" at -9.3,2.502 h1.2
  text "41" at 8.4,2.502 h1.2
  text "47" at 16,2.502 h1.2
  text "43" at 11,2.411 h1.2
Bottom Overlay:
  text "49" at -8.4,35.511 h1.2
  text "51" at -5.9,35.511 h1.2
  text "53" at -3.4,35.511 h1.2
  text "55" at -0.9,35.511 h1.2
  text "57" at 1.7,35.511 h1.2
  text "59" at 4.2,35.511 h1.2
  text "61" at 6.8,35.511 h1.2
  text "63" at 9.3,35.511 h1.2
  text "50" at -8.4,33.011 h1.2
  text "52" at -5.9,33.011 h1.2
  text "54" at -3.4,33.011 h1.2
  text "56" at -0.9,33.011 h1.2
  text "58" at 1.7,33.011 h1.2
  text "60" at 4.3,33.011 h1.2
  text "62" at 6.8,33.011 h1.2
  text "64" at 9.4,33.011 h1.2
  text "2" at 16.7,30.5 h1.2
  text "1" at 19.2,30.5 h1.2
  text "48" at -16,27.911 h1.2
  text "3" at 19.2,27.911 h1.2
  text "47" at -18.6,27.902 h1.2
  text "4" at 16.7,27.902 h1.2
  text "45" at -18.5,25.311 h1.2
  text "46" at -16,25.311 h1.2
  text "6" at 16.7,25.311 h1.2
  text "5" at 19.2,25.311 h1.2
  text "43" at -18.6,22.811 h1.2
  text "8" at 16.7,22.811 h1.2
  text "44" at -16,22.802 h1.2
  text "7" at 19.2,22.802 h1.2
  text "41" at -18.6,20.302 h1.2
  text "42" at -16,20.302 h1.2
  text "10" at 17,20.311 h1.2
  text "9" at 19.2,20.311 h1.2
  text "39" at -18.6,17.811 h1.2
  text "40" at -16,17.711 h1.2
  text "12" at 16.9,17.7 h1.2
  text "11" at 19.5,17.7 h1.2
  text "37" at -18.6,15.211 h1.2
  text "38" at -16.1,15.211 h1.2
  text "13" at 19.4,15.211 h1.2
  text "14" at 17,15.202 h1.2
  text "35" at -18.6,12.611 h1.2
  text "36" at -16.1,12.611 h1.2
  text "16" at 16.9,12.611 h1.2
  text "15" at 19.5,12.611 h1.2
  text "33" at -18.6,10.111 h1.2
  text "34" at -16,10.111 h1.2
  text "LQFP 32-64 0.8MM" at 4.773,9.139 h1.5
  text "32" at -8.4,5.011 h1.2
  text "30" at -5.9,5.011 h1.2
  text "28" at -3.4,5.011 h1.2
  text "26" at -0.8,5.011 h1.2
  text "24" at 1.7,5.002 h1.2
  text "22" at 4.2,5 h1.2
  text "20" at 6.8,5.011 h1.2
  text "18" at 9.3,5.011 h1.2
  text "31" at -8.5,2.511 h1.2
  text "29" at -5.9,2.511 h1.2
  text "25" at -0.8,2.511 h1.2
  text "23" at 1.7,2.511 h1.2
  text "19" at 6.8,2.511 h1.2
  text "27" at -3.4,2.502 h1.2
  text "21" at 4.3,2.5 h1.2
  text "17" at 9.3,2.502 h1.2

## Dimensions
20.7,38.6 to 20.7,0 on Mechanical 1
-20.7,38.6 to 20.7,38.6 on Mechanical 1